# Altium PCB PCB2.PcbDoc
Units mm, origin at the board's own origin, x right, y up, seen from the top; angles counter-clockwise.
Board outline 152.4 x 101.6 mm, 2 copper layers (Top Layer, Bottom Layer); 2 components, 3 nets, 10 pads, 0 vias.
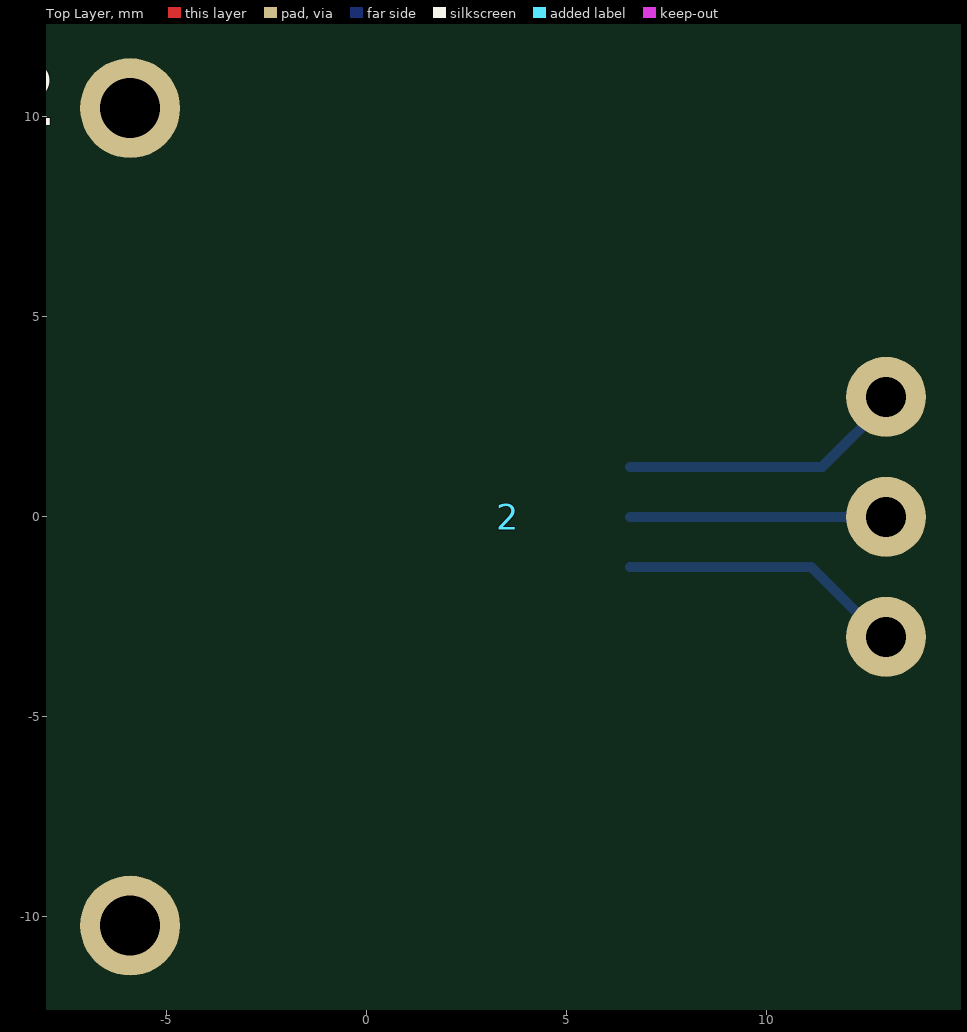
[diagram p0: Top Layer view]
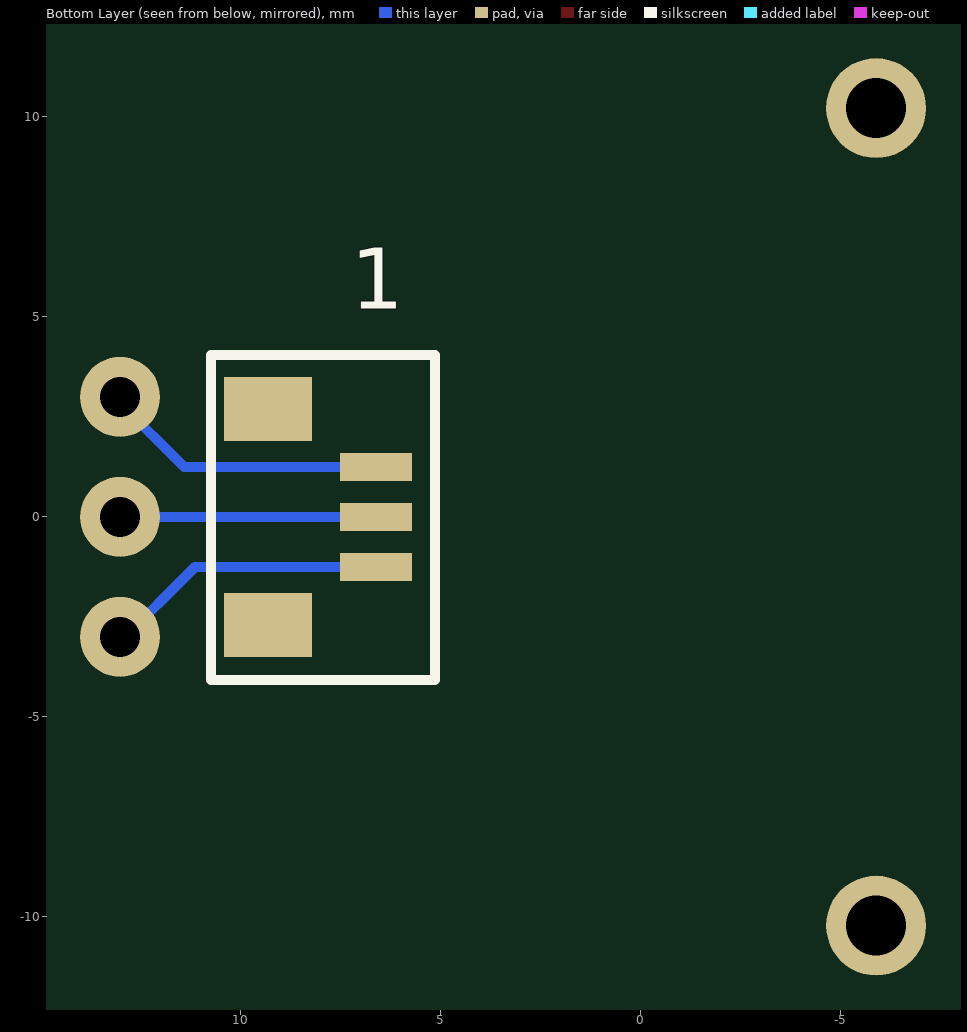
[diagram p1: Bottom Layer view, seen from below]

## Layer stack, top to bottom
Top Solder: solder mask 0.0102, Solder Resist, Dk 3.5
Top Layer: signal copper 0.0356
Dielectric 1: dielectric 0.32, FR-4, Dk 4.8
Bottom Layer: signal copper 0.0356
Bottom Solder: solder mask 0.0102, Solder Resist, Dk 3.5

## Board outline
-56.261,-26.416 96.139,-26.416 96.139,75.184 -56.261,75.184

## Design rules (kind name [scope] priority, off if disabled: settings)
Clearance [All] p1: gap=0.254
PolygonConnect [All] p1: connectstyle=Relief reliefconductorwidth=0.254 reliefentries=4 polygonreliefangle="90 Angle" airgapwidth=0.254
RoutingVias [All] p1: holewidth=0.711 width=1.27 viastyle="Through Hole" minholewidth=0.711 minwidth=1.27 maxholewidth=0.711 maxwidth=1.27
SolderMaskExpansion [All] p1: expansion=0.102
Width [All] p1: maxlimit=0.254 minlimit=0.254 preferedwidth=0.254
29 further rules are at their usual default settings.

## Components (designator, comment, footprint, x,y, rotation, side; value= is the part's Value field where it differs from the comment)
1 "Plugin3P" Plugin3P 6.604,0 r270 bottom
2 "Switch360" Switch360 0,0 r90 top

## Footprints (in the part's own frame and the unit in brackets; to place one, negate y for a bottom-side part, rotate by r counter-clockwise, add the part's x,y. Pads: shape width x height; smd on the part's side, far side on the other; paste and mask are expansions set on the pad)
Plugin3P [mm]
  rect 0.7x1.8 smd: 1(-1.25,0) 2(0,0) 3(1.25,0)
  rect 1.6x2.2 smd: ""(-2.7,-2.7) ""(2.7,-2.7)
  silkscreen extent -4.05,-4.13 4.08,1.48
Switch360 [mm]
  round 2.5 hole 1.5: 0(-10.219,5.9) 0(10.219,5.9)
  round 2 hole 1: 1(-3,-13) 2(0,-13) 3(3,-13)

## Nets (pads, with @x,y where several pads share a name; then routed paths per layer and width w, separated by ;. In a path a pad name is that pad's centre, name@x,y a point inside that pad or via, vN(x,y) a via of type N, cw(c..) or ccw(c..) an arc to the next point about the centre after c; other vN are vias at no path point)
Net1_1: 1.1 2.3 | length 7.1
  Bottom Layer w0.254: 1.1 11.403,1.25 2.3@13.013,2.859
Net1_2: 1.2 2.2 | length 6.5
  Bottom Layer w0.254: 1.2 12.872,0 2.2@13.013,-0.141
Net1_3: 1.3 2.1 | length 7.2
  Bottom Layer w0.254: 1.3 11.122,-1.25 2.1@13.013,-3.141
pads on no net: 1. 2.0

## Silkscreen, mask and mechanical layers (free items; w line width, h text height)
Mechanical 1:
  circle w0.254: c0,0 r15.24